# Altium PCB mini_backplane.PcbDoc (part 3 of 5)
Units mm, origin at the board's own origin, x right, y up, seen from the top; angles counter-clockwise.
Board outline 232.03 x 195 mm, 4 copper layers (Top Layer, GND, POWER, Bottom Layer); 241 components, 200 nets, 1637 pads, 676 vias.
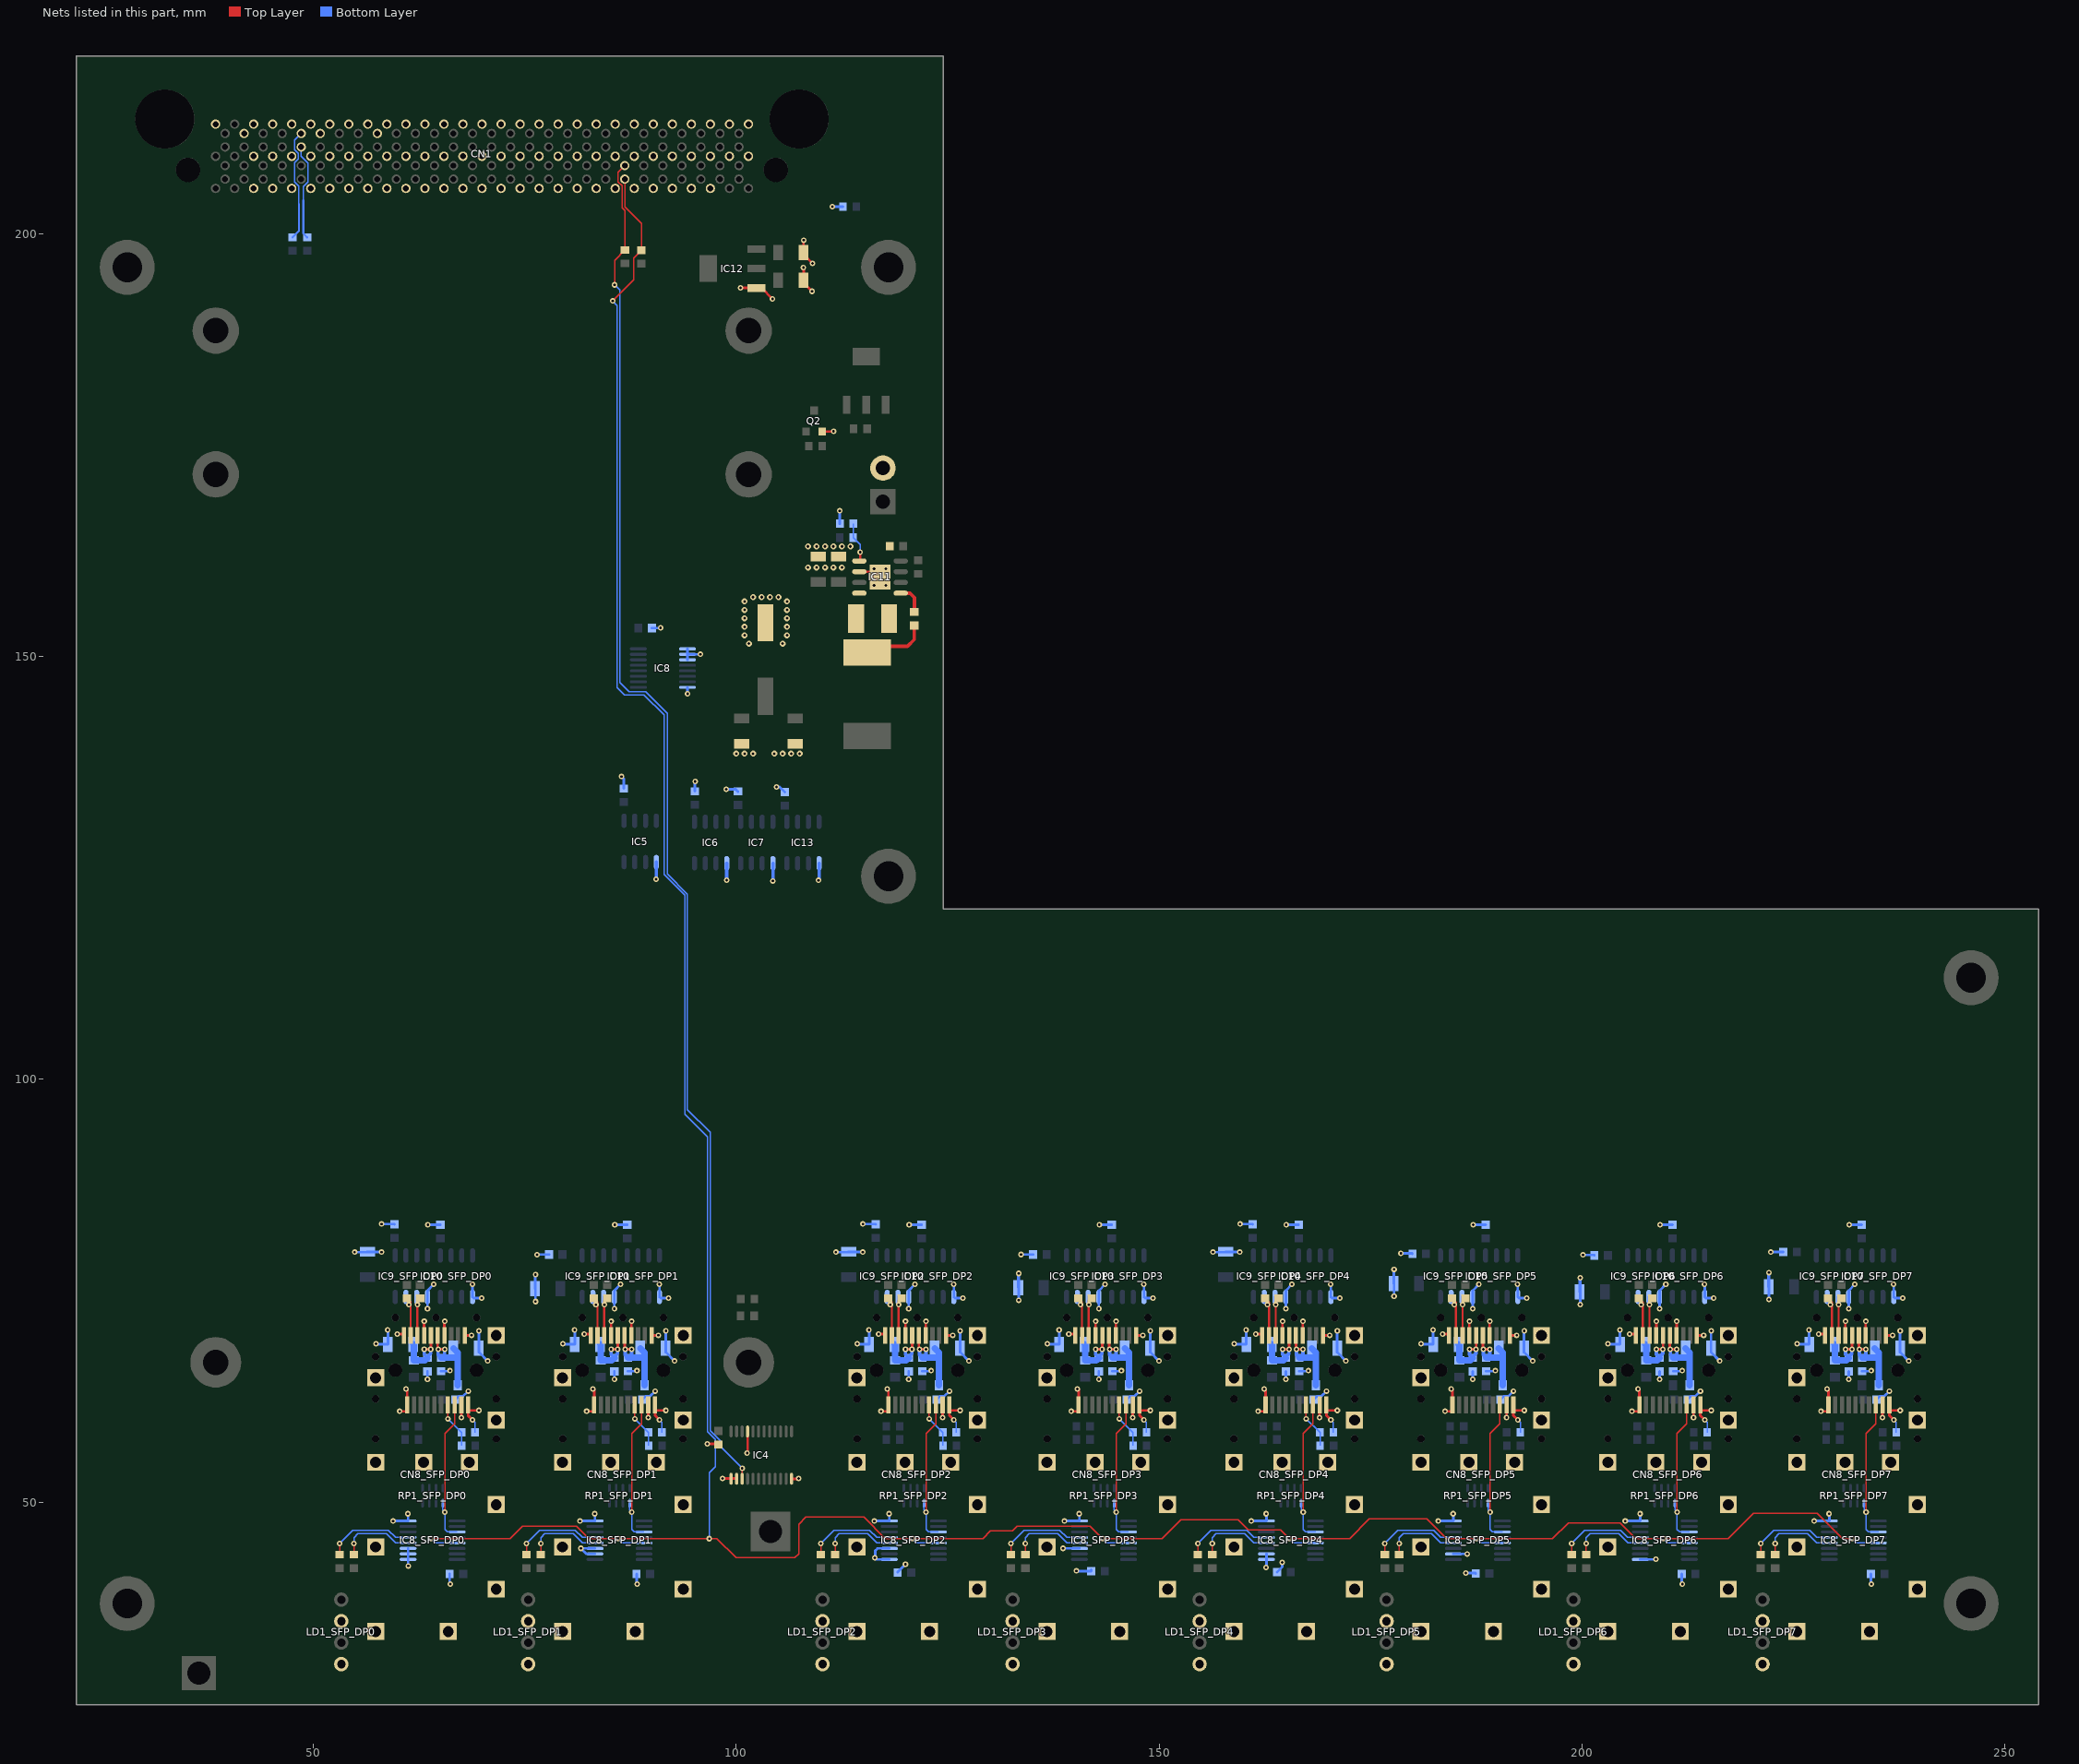
[diagram p5: the nets of this part, all layers, seen from the top]

## Via types
v1: diameter 0.66, hole 0.305, Top Layer to Bottom Layer, tented both sides, 576 vias
v2: diameter 0.711, hole 0.33, Top Layer to Bottom Layer, tented both sides, 97 vias
v3: diameter 0.66, hole 0.305, Top Layer to Bottom Layer, 3 vias

## Nets (pads, with @x,y where several pads share a name; then routed paths per layer and width w, separated by ;. In a path a pad name is that pad's centre, name@x,y a point inside that pad or via, vN(x,y) a via of type N, cw(c..) or ccw(c..) an arc to the next point about the centre after c; other vN are vias at no path point) (continued)
GND: C75.1 C76.1 C77.1 C78.1 C79_SFP_DP0.1 C79_SFP_DP1.1 C79_SFP_DP2.1 C79_SFP_DP3.1 C79_SFP_DP4.1 C79_SFP_DP5.1 C79_SFP_DP6.1 C79_SFP_DP7.1 C80_SFP_DP0.1 C80_SFP_DP1.1 C80_SFP_DP2.1 C80_SFP_DP3.1 C80_SFP_DP4.1 C80_SFP_DP5.1 C80_SFP_DP6.1 C80_SFP_DP7.1 C81_SFP_DP0.1 C81_SFP_DP1.1 C81_SFP_DP2.1 C81_SFP_DP3.1 C81_SFP_DP4.1 C81_SFP_DP5.1 C81_SFP_DP6.1 C81_SFP_DP7.1 C85.2 C86.1 C87.1 C88.1 C89.1 C90.1 C91.1 C92.1 C93.1 C117_SFP_DP0.2 C117_SFP_DP1.2 C117_SFP_DP2.2 C117_SFP_DP3.2 C117_SFP_DP4.2 C117_SFP_DP5.2 C117_SFP_DP6.2 C117_SFP_DP7.2 C118_SFP_DP0.2 C118_SFP_DP1.2 C118_SFP_DP2.2 C118_SFP_DP3.2 C118_SFP_DP4.2 C118_SFP_DP5.2 C118_SFP_DP6.2 C118_SFP_DP7.2 C120_SFP_DP0.1 C120_SFP_DP1.1 C120_SFP_DP2.1 C120_SFP_DP3.1 C120_SFP_DP4.1 C120_SFP_DP5.1 C120_SFP_DP6.1 C120_SFP_DP7.1 C121.1 C121_SFP_DP0.1 C121_SFP_DP1.1 C121_SFP_DP2.1 C121_SFP_DP3.1 C121_SFP_DP4.1 C121_SFP_DP5.1 C121_SFP_DP6.1 C121_SFP_DP7.1 C122_SFP_DP0.1 C122_SFP_DP1.1 C122_SFP_DP2.1 C122_SFP_DP3.1 C122_SFP_DP4.1 C122_SFP_DP5.1 C122_SFP_DP6.1 C122_SFP_DP7.1 C123_SFP_DP0.1 C123_SFP_DP1.1 C123_SFP_DP2.1 C123_SFP_DP3.1 C123_SFP_DP4.1 C123_SFP_DP5.1 C123_SFP_DP6.1 C123_SFP_DP7.1 CN1.1 CN1.5 CN1.7 CN1.10 CN1.13 CN1.16 CN1.17 CN1.19 CN1.22 CN1.25 CN1.26 CN1.28 CN1.31 CN1.34 CN1.37 CN1.40 CN1.43 CN1.46 CN1.49 CN1.52 CN1.55 CN1.58 CN1.61 CN1.64 CN1.67 CN1.70 CN1.73 CN1.76 CN1.79 CN1.82 CN1.85 CN1.86 CN1.89 CN1.92 CN1.92A CN1.95 CN1.95A CN1.98 CN1.98A CN1.101 CN1.101A CN1.104 CN1.104A CN1.107 CN1.107A CN1.110 CN1.110A CN1.113 CN1.113A CN1.116 CN1.116A CN1.119 CN1.119A CN1.122 CN1.122A CN1.125 CN1.125A CN1.128 CN1.128A CN1.131 CN1.131A CN1.134 CN1.134A CN1.137 CN1.137A CN1.140 CN1.140A CN1.143 CN1.143A CN1.146 CN1.146A CN1.149 CN1.149A CN1.152 CN1.152A CN1.155 CN1.155A CN1.158 CN1.158A CN1.161 CN1.161A CN1.164 CN1.164A CN2.2 CN8_SFP_DP0.1 CN8_SFP_DP0.9 CN8_SFP_DP0.10 CN8_SFP_DP0.11 CN8_SFP_DP0.14 CN8_SFP_DP0.17 CN8_SFP_DP0.20 CN8_SFP_DP0.21 CN8_SFP_DP0.22 CN8_SFP_DP0.23 CN8_SFP_DP0.24 CN8_SFP_DP0.25 CN8_SFP_DP0.26 CN8_SFP_DP0.27 CN8_SFP_DP0.28 CN8_SFP_DP0.29 CN8_SFP_DP0.30 CN8_SFP_DP0.31 CN8_SFP_DP1.1 CN8_SFP_DP1.9 CN8_SFP_DP1.10 CN8_SFP_DP1.11 CN8_SFP_DP1.14 CN8_SFP_DP1.17 CN8_SFP_DP1.20 CN8_SFP_DP1.21 CN8_SFP_DP1.22 CN8_SFP_DP1.23 CN8_SFP_DP1.24 CN8_SFP_DP1.25 CN8_SFP_DP1.26 CN8_SFP_DP1.27 CN8_SFP_DP1.28 CN8_SFP_DP1.29 CN8_SFP_DP1.30 CN8_SFP_DP1.31 CN8_SFP_DP2.1 CN8_SFP_DP2.9 CN8_SFP_DP2.10 CN8_SFP_DP2.11 CN8_SFP_DP2.14 CN8_SFP_DP2.17 CN8_SFP_DP2.20 CN8_SFP_DP2.21 CN8_SFP_DP2.22 CN8_SFP_DP2.23 CN8_SFP_DP2.24 CN8_SFP_DP2.25 CN8_SFP_DP2.26 CN8_SFP_DP2.27 CN8_SFP_DP2.28 CN8_SFP_DP2.29 CN8_SFP_DP2.30 CN8_SFP_DP2.31 CN8_SFP_DP3.1 CN8_SFP_DP3.9 CN8_SFP_DP3.10 CN8_SFP_DP3.11 CN8_SFP_DP3.14 CN8_SFP_DP3.17 CN8_SFP_DP3.20 CN8_SFP_DP3.21 CN8_SFP_DP3.22 CN8_SFP_DP3.23 CN8_SFP_DP3.24 CN8_SFP_DP3.25 CN8_SFP_DP3.26 CN8_SFP_DP3.27 CN8_SFP_DP3.28 CN8_SFP_DP3.29 CN8_SFP_DP3.30 CN8_SFP_DP3.31 CN8_SFP_DP4.1 CN8_SFP_DP4.9 CN8_SFP_DP4.10 CN8_SFP_DP4.11 CN8_SFP_DP4.14 CN8_SFP_DP4.17 CN8_SFP_DP4.20 CN8_SFP_DP4.21 CN8_SFP_DP4.22 CN8_SFP_DP4.23 CN8_SFP_DP4.24 CN8_SFP_DP4.25 CN8_SFP_DP4.26 CN8_SFP_DP4.27 CN8_SFP_DP4.28 CN8_SFP_DP4.29 CN8_SFP_DP4.30 CN8_SFP_DP4.31 CN8_SFP_DP5.1 CN8_SFP_DP5.9 CN8_SFP_DP5.10 CN8_SFP_DP5.11 CN8_SFP_DP5.14 CN8_SFP_DP5.17 CN8_SFP_DP5.20 CN8_SFP_DP5.21 CN8_SFP_DP5.22 CN8_SFP_DP5.23 CN8_SFP_DP5.24 CN8_SFP_DP5.25 CN8_SFP_DP5.26 CN8_SFP_DP5.27 CN8_SFP_DP5.28 CN8_SFP_DP5.29 CN8_SFP_DP5.30 CN8_SFP_DP5.31 CN8_SFP_DP6.1 CN8_SFP_DP6.9 CN8_SFP_DP6.10 CN8_SFP_DP6.11 CN8_SFP_DP6.14 CN8_SFP_DP6.17 CN8_SFP_DP6.20 CN8_SFP_DP6.21 CN8_SFP_DP6.22 CN8_SFP_DP6.23 CN8_SFP_DP6.24 CN8_SFP_DP6.25 CN8_SFP_DP6.26 CN8_SFP_DP6.27 CN8_SFP_DP6.28 CN8_SFP_DP6.29 CN8_SFP_DP6.30 CN8_SFP_DP6.31 CN8_SFP_DP7.1 CN8_SFP_DP7.9 CN8_SFP_DP7.10 CN8_SFP_DP7.11 CN8_SFP_DP7.14 CN8_SFP_DP7.17 CN8_SFP_DP7.20 CN8_SFP_DP7.21 CN8_SFP_DP7.22 CN8_SFP_DP7.23 CN8_SFP_DP7.24 CN8_SFP_DP7.25 CN8_SFP_DP7.26 CN8_SFP_DP7.27 CN8_SFP_DP7.28 CN8_SFP_DP7.29 CN8_SFP_DP7.30 CN8_SFP_DP7.31 D1.1 IC4.1 IC4.2 IC4.12 IC4.21 IC5.1 IC6.1 IC7.1 IC8.1 IC8.2 IC8.3 IC8.8 IC8_SFP_DP0.1 IC8_SFP_DP0.2 IC8_SFP_DP0.3 IC8_SFP_DP0.8 IC8_SFP_DP1.2 IC8_SFP_DP1.3 IC8_SFP_DP1.8 IC8_SFP_DP2.1 IC8_SFP_DP2.3 IC8_SFP_DP2.8 IC8_SFP_DP3.3 IC8_SFP_DP3.8 IC8_SFP_DP4.1 IC8_SFP_DP4.2 IC8_SFP_DP4.8 IC8_SFP_DP5.2 IC8_SFP_DP5.8 IC8_SFP_DP6.1 IC8_SFP_DP6.8 IC8_SFP_DP7.8 IC9_SFP_DP0.1 IC9_SFP_DP1.1 IC9_SFP_DP2.1 IC9_SFP_DP3.1 IC9_SFP_DP4.1 IC9_SFP_DP5.1 IC9_SFP_DP6.1 IC9_SFP_DP7.1 IC10_SFP_DP0.1 IC10_SFP_DP1.1 IC10_SFP_DP2.1 IC10_SFP_DP3.1 IC10_SFP_DP4.1 IC10_SFP_DP5.1 IC10_SFP_DP6.1 IC10_SFP_DP7.1 IC11.6 IC11.PAD IC12.1 IC13.1 LD1_SFP_DP0.1 LD1_SFP_DP0.3 LD1_SFP_DP1.1 LD1_SFP_DP1.3 LD1_SFP_DP2.1 LD1_SFP_DP2.3 LD1_SFP_DP3.1 LD1_SFP_DP3.3 LD1_SFP_DP4.1 LD1_SFP_DP4.3 LD1_SFP_DP5.1 LD1_SFP_DP5.3 LD1_SFP_DP6.1 LD1_SFP_DP6.3 LD1_SFP_DP7.1 LD1_SFP_DP7.3 Q2.2 R12.2 R70_SFP_DP0.1 R70_SFP_DP1.1 R70_SFP_DP2.1 R70_SFP_DP3.1 R70_SFP_DP4.1 R70_SFP_DP5.1 R70_SFP_DP6.1 R70_SFP_DP7.1 R77.1 | length 416.9
  Top Layer w0.305: v1(59.944,69.85) 60.552,69.85 CN8_SFP_DP0.20@60.709,69.694 ; v1(60.223,60.731) 61.036,60.731 61.109,60.804 CN8_SFP_DP0.1@61.109,61.494 61.109,63.351 61.087,63.373 v1(60.96,63.373) ; CN8_SFP_DP0.17@63.109,69.694 63.109,71.364 v1(63.119,71.374) ; CN8_SFP_DP0.14@65.509,69.694 65.509,71.351 v1(65.532,71.374) ; v1(67.509,59.999) CN8_SFP_DP0.9@67.509,61.494 ; CN8_SFP_DP0.11@67.909,69.694 68.678,69.694 v1(68.707,69.723) ; v1(68.834,59.715) 68.309,60.241 CN8_SFP_DP0.10@68.309,61.494 68.309,60.833 v1(69.596,60.833) ; v1(82.042,69.85) 82.65,69.85 CN8_SFP_DP1.20@82.807,69.694 ; v1(82.321,60.731) 83.134,60.731 83.207,60.804 CN8_SFP_DP1.1@83.207,61.494 83.207,63.351 83.185,63.373 v1(83.058,63.373) ; CN8_SFP_DP1.17@85.207,69.694 85.207,71.364 v1(85.217,71.374) ; CN8_SFP_DP1.14@87.607,69.694 87.607,71.351 v1(87.63,71.374) ; v1(89.607,59.999) CN8_SFP_DP1.9@89.607,61.494 ; CN8_SFP_DP1.11@90.007,69.694 90.776,69.694 v1(90.805,69.723) ; v1(90.932,59.715) 90.407,60.241 CN8_SFP_DP1.10@90.407,61.494 90.407,60.833 v1(91.694,60.833) ; v1(96.596,56.871) 97.828,56.871 C75.1@97.892,56.807 ; v1(98.4,52.781) 100.015,52.781 IC4.2@100.047,52.75 ; v1(100.508,193.573) 100.522,193.559 IC12.1@102.393,193.559 103.011,193.559 v1(104.292,192.278) ; v1(101.295,55.804) 101.347,55.855 IC4.21@101.347,58.35 101.347,57.125 ; IC4.12@106.547,52.75 107.36,52.75 v1(107.391,52.781) ; v1(107.95,195.961) 107.977,195.934 C89.1@107.977,194.462 107.977,194.156 v1(108.966,193.167) ; v1(107.975,199.212) 107.951,199.188 C86.1@107.951,197.764 107.951,197.534 v1(109.017,196.469) ; Q2.2@110.17,176.575 111.475,176.575 v1(111.506,176.606) ; IC11.6@114.554,160.01 116.369,160.01 IC11.PAD@117.004,159.375 ; v1(116.84,69.85) 117.448,69.85 CN8_SFP_DP2.20@117.605,69.694 ; v1(117.119,60.731) 117.932,60.731 118.005,60.804 CN8_SFP_DP2.1@118.005,61.494 118.005,63.351 117.983,63.373 v1(117.856,63.373) ; CN8_SFP_DP2.17@120.005,69.694 120.005,71.364 v1(120.015,71.374) ; CN8_SFP_DP2.14@122.405,69.694 122.405,71.351 v1(122.428,71.374) ; v1(124.405,59.999) CN8_SFP_DP2.9@124.405,61.494 ; CN8_SFP_DP2.11@124.805,69.694 125.574,69.694 v1(125.603,69.723) ; v1(125.73,59.715) 125.205,60.241 CN8_SFP_DP2.10@125.205,61.494 125.205,60.833 v1(126.492,60.833) ; v1(139.319,69.85) 139.927,69.85 CN8_SFP_DP3.20@140.084,69.694 ; v1(139.598,60.731) 140.411,60.731 140.484,60.804 CN8_SFP_DP3.1@140.484,61.494 140.484,63.351 140.462,63.373 v1(140.335,63.373) ; CN8_SFP_DP3.17@142.484,69.694 142.484,71.364 v1(142.494,71.374) ; CN8_SFP_DP3.14@144.884,69.694 144.884,71.351 v1(144.907,71.374) ; v1(146.884,59.999) CN8_SFP_DP3.9@146.884,61.494 ; CN8_SFP_DP3.11@147.284,69.694 148.053,69.694 v1(148.082,69.723) ; v1(148.209,59.715) 147.684,60.241 CN8_SFP_DP3.10@147.684,61.494 147.684,60.833 v1(148.971,60.833) ; v1(161.417,69.85) 162.025,69.85 CN8_SFP_DP4.20@162.182,69.694 ; v1(161.696,60.731) 162.509,60.731 162.582,60.804 CN8_SFP_DP4.1@162.582,61.494 162.582,63.351 162.56,63.373 v1(162.433,63.373) ; CN8_SFP_DP4.17@164.582,69.694 164.582,71.364 v1(164.592,71.374) ; CN8_SFP_DP4.14@166.982,69.694 166.982,71.351 v1(167.005,71.374) ; v1(168.982,59.999) CN8_SFP_DP4.9@168.982,61.494 ; CN8_SFP_DP4.11@169.382,69.694 170.151,69.694 v1(170.18,69.723) ; v1(170.307,59.715) 169.782,60.241 CN8_SFP_DP4.10@169.782,61.494 169.782,60.833 v1(171.069,60.833) ; v1(183.515,69.85) 184.123,69.85 CN8_SFP_DP5.20@184.28,69.694 ; v1(183.794,60.731) 184.607,60.731 184.68,60.804 CN8_SFP_DP5.1@184.68,61.494 184.68,63.351 184.658,63.373 v1(184.531,63.373) ; CN8_SFP_DP5.17@186.68,69.694 186.68,71.364 v1(186.69,71.374) ; CN8_SFP_DP5.14@189.08,69.694 189.08,71.351 v1(189.103,71.374) ; v1(191.08,59.999) CN8_SFP_DP5.9@191.08,61.494 ; CN8_SFP_DP5.11@191.48,69.694 192.249,69.694 v1(192.278,69.723) ; v1(192.405,59.715) 191.88,60.241 CN8_SFP_DP5.10@191.88,61.494 191.88,60.833 v1(193.167,60.833) ; v1(205.613,69.85) 206.221,69.85 CN8_SFP_DP6.20@206.378,69.694 ; v1(205.892,60.731) 206.705,60.731 206.778,60.804 CN8_SFP_DP6.1@206.778,61.494 206.778,63.351 206.756,63.373 v1(206.629,63.373) ; CN8_SFP_DP6.17@208.778,69.694 208.778,71.364 v1(208.788,71.374) ; CN8_SFP_DP6.14@211.178,69.694 211.178,71.351 v1(211.201,71.374) ; v1(213.178,59.999) CN8_SFP_DP6.9@213.178,61.494 ; CN8_SFP_DP6.11@213.578,69.694 214.347,69.694 v1(214.376,69.723) ; v1(214.503,59.715) 213.978,60.241 CN8_SFP_DP6.10@213.978,61.494 213.978,60.833 v1(215.265,60.833) ; v1(227.965,69.85) 228.573,69.85 CN8_SFP_DP7.20@228.73,69.694 ; v1(228.244,60.731) 229.057,60.731 229.13,60.804 CN8_SFP_DP7.1@229.13,61.494 229.13,63.351 229.108,63.373 v1(228.981,63.373) ; CN8_SFP_DP7.17@231.13,69.694 231.13,71.364 v1(231.14,71.374) ; CN8_SFP_DP7.14@233.53,69.694 233.53,71.351 v1(233.553,71.374) ; v1(235.53,59.999) CN8_SFP_DP7.9@235.53,61.494 ; CN8_SFP_DP7.11@235.93,69.694 236.699,69.694 v1(236.728,69.723) ; v1(236.855,59.715) 236.33,60.241 CN8_SFP_DP7.10@236.33,61.494 236.33,60.833 v1(237.617,60.833)
  Bottom Layer w0.152: v1(68.834,59.715) 69.126,59.423 R70_SFP_DP0.1@69.126,58.242 ; v1(90.932,59.715) 91.224,59.423 R70_SFP_DP1.1@91.224,58.242 ; v1(125.73,59.715) 126.022,59.423 R70_SFP_DP2.1@126.022,58.242 ; v1(148.209,59.715) 148.501,59.423 R70_SFP_DP3.1@148.501,58.242 ; v1(170.307,59.715) 170.599,59.423 R70_SFP_DP4.1@170.599,58.242 ; v1(192.405,59.715) 192.697,59.423 R70_SFP_DP5.1@192.697,58.242 ; v1(214.503,59.715) 214.795,59.423 R70_SFP_DP6.1@214.795,58.242 ; v1(236.855,59.715) 237.147,59.423 R70_SFP_DP7.1@237.147,58.242
  Bottom Layer w0.305: v1(54.889,79.553) v1(58.064,79.553) 58.012,79.605 C122_SFP_DP0.1@56.388,79.605 ; v1(57.404,68.707) 57.455,68.656 C120_SFP_DP0.1@58.825,68.656 58.825,70.334 v1(58.801,70.358) ; v1(58.09,82.88) 59.55,82.88 C80_SFP_DP0.1@59.588,82.842 ; v1(59.436,47.752) 59.45,47.766 IC8_SFP_DP0.8@61.21,47.766 61.21,48.595 v1(61.189,48.616) ; IC8_SFP_DP0.3@61.21,44.516 61.21,42.473 v3(61.239,42.443) ; v1(63.5,64.516) C79_SFP_DP0.1@63.5,65.443 ; v1(63.5,72.873) IC9_SFP_DP0.1@63.5,74.258 63.5,75.006 v1(64.237,75.743) ; v1(63.551,82.779) 63.563,82.791 C81_SFP_DP0.1@65.024,82.791 ; C118_SFP_DP0.2@65.1,65.469 66.104,65.469 v1(66.167,65.532) ; C121_SFP_DP0.1@66.129,41.504 66.129,40.373 v1(66.192,40.31) ; C123_SFP_DP0.1@66.789,62.103 67.17,62.484 67.691,62.484 v1(68.326,63.119) ; v1(68.809,75.743) 68.834,75.717 IC10_SFP_DP0.1@68.834,74.258 68.975,74.117 v1(69.901,74.117) ; v1(69.596,70.231) 69.469,70.231 69.572,70.128 C117_SFP_DP0.2@69.572,68.174 69.572,67.715 v1(70.612,66.675) ; C122_SFP_DP1.1@76.224,75.209 76.224,76.834 v1(76.276,76.886) v1(76.276,73.711) ; v1(76.454,79.248) 76.479,79.273 C80_SFP_DP1.1@77.864,79.273 ; v1(79.502,68.707) 79.553,68.656 C120_SFP_DP1.1@80.923,68.656 80.923,70.334 v1(80.899,70.358) ; v1(81.534,47.752) 81.548,47.766 IC8_SFP_DP1.8@83.308,47.766 83.308,48.595 v1(83.287,48.616) ; v3(81.636,44.526) v3@81.645,44.516 ; IC8_SFP_DP1.2@83.308,43.866 82.295,43.866 v3@81.645,44.516 ; IC8_SFP_DP1.3@83.308,44.516 v3@81.645,44.516 ; v1(85.598,64.516) C79_SFP_DP1.1@85.598,65.443 ; v1(85.598,72.873) IC9_SFP_DP1.1@85.598,74.258 85.598,75.006 v1(86.335,75.743) ; v1(85.649,82.779) 85.661,82.791 C81_SFP_DP1.1@87.122,82.791 ; v1(86.436,135.788) 86.716,135.509 C77.1@86.716,134.379 ; C118_SFP_DP1.2@87.198,65.469 88.202,65.469 v1(88.265,65.532) ; C121_SFP_DP1.1@88.227,41.504 88.227,40.373 v1(88.29,40.31) ; C123_SFP_DP1.1@88.887,62.103 89.268,62.484 89.789,62.484 v1(90.424,63.119) ; C121.1@90.03,153.34 91.034,153.34 v1(91.059,153.365) ; v1(90.907,75.743) 90.932,75.717 IC10_SFP_DP1.1@90.932,74.258 91.073,74.117 v1(91.999,74.117) ; v1(91.694,70.231) 91.567,70.231 91.67,70.128 C117_SFP_DP1.2@91.67,68.174 91.67,67.715 v1(92.71,66.675) ; IC8.8@94.238,146.34 94.238,145.588 v1(94.259,145.567) ; IC8.3@94.238,149.59 IC8.2@94.238,150.24 ; IC8.1@94.238,150.89 IC8.2@94.238,150.24 ; C90.1@95.123,134.048 95.123,135.179 v1(95.148,135.204) ; v1(95.758,150.241) IC8.2@94.238,150.24 ; v1(98.806,134.29) 99.936,134.29 C76.1@100.203,134.023 ; v1(104.775,134.569) 105.118,134.569 C78.1@105.74,133.947 ; v1(111.354,203.175) R12.2@112.611,203.175 ; v1(111.785,79.553) v1(114.96,79.553) 114.908,79.605 C122_SFP_DP2.1@113.284,79.605 ; v1(112.243,167.208) 112.255,167.195 C91.1@112.255,165.684 ; v1(114.3,68.707) 114.351,68.656 C120_SFP_DP2.1@115.721,68.656 115.721,70.334 v1(115.697,70.358) ; v1(114.986,82.88) 116.446,82.88 C80_SFP_DP2.1@116.484,82.842 ; v1(116.332,47.752) 116.346,47.766 IC8_SFP_DP2.8@118.106,47.766 118.106,48.595 v1(118.085,48.616) ; IC8_SFP_DP2.1@118.106,43.216 116.575,43.216 v1(116.383,43.409) 116.434,43.459 116.434,44.247 116.703,44.516 IC8_SFP_DP2.3@118.106,44.516 ; C121_SFP_DP2.1@119.088,41.72 v1(120.015,42.647) ; v1(120.396,64.516) C79_SFP_DP2.1@120.396,65.443 ; v1(120.396,72.873) IC9_SFP_DP2.1@120.396,74.258 120.396,75.006 v1(121.133,75.743) ; v1(120.447,82.779) 120.459,82.791 C81_SFP_DP2.1@121.92,82.791 ; C118_SFP_DP2.2@121.996,65.469 123,65.469 v1(123.063,65.532) ; C123_SFP_DP2.1@123.685,62.103 124.066,62.484 124.587,62.484 v1(125.222,63.119) ; v1(125.705,75.743) 125.73,75.717 IC10_SFP_DP2.1@125.73,74.258 125.871,74.117 v1(126.797,74.117) ; v1(126.492,70.231) 126.365,70.231 126.468,70.128 C117_SFP_DP2.2@126.468,68.174 126.468,67.715 v1(127.508,66.675) ; C122_SFP_DP3.1@133.349,75.362 133.349,76.986 v1(133.401,77.038) v1(133.401,73.863) ; v1(133.68,79.273) C80_SFP_DP3.1@135.09,79.273 ; v1(136.779,68.707) 136.83,68.656 C120_SFP_DP3.1@138.2,68.656 138.2,70.334 v1(138.176,70.358) ; v1(138.633,44.526) 140.575,44.526 IC8_SFP_DP3.3@140.585,44.516 ; v1(138.811,47.752) 138.825,47.766 IC8_SFP_DP3.8@140.585,47.766 140.585,48.595 v1(140.564,48.616) ; v1(140.208,41.859) 140.233,41.834 C121_SFP_DP3.1@141.973,41.834 C121_SFP_DP3.1@141.973,41.999 ; v1(142.875,64.516) C79_SFP_DP3.1@142.875,65.443 ; v1(142.875,72.873) IC9_SFP_DP3.1@142.875,74.258 142.875,75.006 v1(143.612,75.743) ; v1(142.926,82.779) 142.938,82.791 C81_SFP_DP3.1@144.399,82.791 ; C118_SFP_DP3.2@144.475,65.469 145.479,65.469 v1(145.542,65.532) ; C123_SFP_DP3.1@146.164,62.103 146.545,62.484 147.066,62.484 v1(147.701,63.119) ; v1(148.184,75.743) 148.209,75.717 IC10_SFP_DP3.1@148.209,74.258 148.35,74.117 v1(149.276,74.117) ; v1(148.971,70.231) 148.844,70.231 148.947,70.128 C117_SFP_DP3.2@148.947,68.174 148.947,67.715 v1(149.987,66.675) ; v1(156.362,79.553) v1(159.537,79.553) 159.485,79.605 C122_SFP_DP4.1@157.861,79.605 ; v1(158.877,68.707) 158.928,68.656 C120_SFP_DP4.1@160.298,68.656 160.298,70.334 v1(160.274,70.358) ; v1(159.563,82.88) 161.023,82.88 C80_SFP_DP4.1@161.061,82.842 ; v1(160.909,47.752) 160.923,47.766 IC8_SFP_DP4.8@162.683,47.766 162.683,48.595 v1(162.662,48.616) ; v1(162.636,42.266) 162.683,42.312 IC8_SFP_DP4.1@162.683,43.216 IC8_SFP_DP4.2@162.683,43.866 ; C121_SFP_DP4.1@163.944,41.732 164.541,42.329 v1(164.541,42.85) ; v1(164.973,64.516) C79_SFP_DP4.1@164.973,65.443 ; v1(164.973,72.873) IC9_SFP_DP4.1@164.973,74.258 164.973,75.006 v1(165.71,75.743) ; v1(165.024,82.779) 165.036,82.791 C81_SFP_DP4.1@166.497,82.791 ; C118_SFP_DP4.2@166.573,65.469 167.577,65.469 v1(167.64,65.532) ; C123_SFP_DP4.1@168.262,62.103 168.643,62.484 169.164,62.484 v1(169.799,63.119) ; v1(170.282,75.743) 170.307,75.717 IC10_SFP_DP4.1@170.307,74.258 170.448,74.117 v1(171.374,74.117) ; v1(171.069,70.231) 170.942,70.231 171.045,70.128 C117_SFP_DP4.2@171.045,68.174 171.045,67.715 v1(172.085,66.675) ; C122_SFP_DP5.1@177.722,75.844 177.722,77.469 v1(177.775,77.521) v1(177.775,74.346) ; v1(178.587,79.4) 179.896,79.4 C80_SFP_DP5.1@179.946,79.35 ; v1(180.975,68.707) 181.026,68.656 C120_SFP_DP5.1@182.396,68.656 182.396,70.334 v1(182.372,70.358) ; v1(183.007,47.752) 183.021,47.766 IC8_SFP_DP5.8@184.781,47.766 184.781,48.595 v1(184.76,48.616) ; IC8_SFP_DP5.2@184.781,43.866 v1(186.436,43.866) ; v1(186.258,41.605) 187.389,41.605 C121_SFP_DP5.1@187.439,41.554 ; v1(187.071,64.516) C79_SFP_DP5.1@187.071,65.443 ; v1(187.071,72.873) IC9_SFP_DP5.1@187.071,74.258 187.071,75.006 v1(187.808,75.743) ; v1(187.122,82.779) 187.134,82.791 C81_SFP_DP5.1@188.595,82.791 ; C118_SFP_DP5.2@188.671,65.469 189.675,65.469 v1(189.738,65.532) ; C123_SFP_DP5.1@190.36,62.103 190.741,62.484 191.262,62.484 v1(191.897,63.119) ; v1(192.38,75.743) 192.405,75.717 IC10_SFP_DP5.1@192.405,74.258 192.546,74.117 v1(193.472,74.117) ; v1(193.167,70.231) 193.04,70.231 193.143,70.128 C117_SFP_DP5.2@193.143,68.174 193.143,67.715 v1(194.183,66.675) ; C122_SFP_DP6.1@199.719,74.854 199.719,76.478 v1(199.771,76.53) v1(199.771,73.355) ; v1(200.101,79.223) 201.409,79.223 C80_SFP_DP6.1@201.46,79.172 ; v1(203.073,68.707) 203.124,68.656 C120_SFP_DP6.1@204.494,68.656 204.494,70.334 v1(204.47,70.358) ; v1(205.105,47.752) 205.119,47.766 IC8_SFP_DP6.8@206.879,47.766 206.879,48.595 v1(206.858,48.616) ; IC8_SFP_DP6.1@206.879,43.216 208.723,43.216 v1(208.737,43.231) ; v1(209.169,64.516) C79_SFP_DP6.1@209.169,65.443 ; v1(209.169,72.873) IC9_SFP_DP6.1@209.169,74.258 209.169,75.006 v1(209.906,75.743) ; v1(209.22,82.779) 209.232,82.791 C81_SFP_DP6.1@210.693,82.791 ; C118_SFP_DP6.2@210.769,65.469 211.773,65.469 v1(211.836,65.532) ; C121_SFP_DP6.1@211.798,41.504 211.798,40.373 v1(211.861,40.31) ; C123_SFP_DP6.1@212.458,62.103 212.839,62.484 213.36,62.484 v1(213.995,63.119) ; v1(214.478,75.743) 214.503,75.717 IC10_SFP_DP6.1@214.503,74.258 214.644,74.117 v1(215.57,74.117) ; v1(215.265,70.231) 215.138,70.231 215.241,70.128 C117_SFP_DP6.2@215.241,68.174 215.241,67.715 v1(216.281,66.675) ; C122_SFP_DP7.1@222.045,75.463 222.045,77.088 v1(222.098,77.14) v1(222.098,73.965) ; v1(222.301,79.553) 222.326,79.578 C80_SFP_DP7.1@223.787,79.578 ; v1(225.425,68.707) 225.476,68.656 C120_SFP_DP7.1@226.846,68.656 226.846,70.334 v1(226.822,70.358) ; v1(227.457,47.752) 227.471,47.766 IC8_SFP_DP7.8@229.231,47.766 229.231,48.595 v1(229.21,48.616) ; v1(231.521,64.516) C79_SFP_DP7.1@231.521,65.443 ; v1(231.521,72.873) IC9_SFP_DP7.1@231.521,74.258 231.521,75.006 v1(232.258,75.743) ; v1(231.572,82.779) 231.584,82.791 C81_SFP_DP7.1@233.045,82.791 ; C118_SFP_DP7.2@233.121,65.469 234.125,65.469 v1(234.188,65.532) ; C121_SFP_DP7.1@234.15,41.504 234.15,40.373 v1(234.213,40.31) ; C123_SFP_DP7.1@234.81,62.103 235.191,62.484 235.712,62.484 v1(236.347,63.119) ; v1(236.83,75.743) 236.855,75.717 IC10_SFP_DP7.1@236.855,74.258 236.996,74.117 v1(237.922,74.117) ; v1(237.617,70.231) 237.49,70.231 237.593,70.128 C117_SFP_DP7.2@237.593,68.174 237.593,67.715 v1(238.633,66.675)
  Bottom Layer w0.406: v1(90.526,123.647) 90.551,123.673 IC5.1@90.551,125.668 ; v1(98.882,123.546) IC6.1@98.882,125.541 ; v1(104.343,123.444) IC7.1@104.343,125.541 ; v1(109.728,123.52) 109.804,123.596 IC13.1@109.804,125.541
  other v2: 100,138.5 101,138.5 102,138.5 104.5,138.5 105.5,138.5 106.5,138.5 107.5,138.5 101.5,151.5 105.5,151.5 101,152.5 106,152.5 101,153.5 106,153.5 101,154.5 106,154.5 101,155.5 106,155.5 101,156.5 106,156.5 102,157 103,157 104,157 105,157 116.304,158.375 117.704,158.375 116.304,160.375 117.704,160.375 108.5,160.5 109.5,160.5 110.5,160.5 111.5,160.5 112.5,160.5 108.5,163 109.5,163 110.5,163 111.5,163 112.5,163 113.5,163
I2C_IRQ: CN1.105 IC8_SFP_DP0.13 IC8_SFP_DP1.13 IC8_SFP_DP2.13 IC8_SFP_DP3.13 IC8_SFP_DP4.13 IC8_SFP_DP5.13 IC8_SFP_DP6.13 IC8_SFP_DP7.13 R1.1 | length 380.9
  Top Layer w0.152: v1(63.932,45.669) 73.279,45.669 74.752,47.142 81.128,47.142 82.601,45.669 v1(86.03,45.669) v1(96.825,45.669) 97.714,45.669 99.974,43.409 106.934,43.409 107.417,43.891 107.417,47.371 108.255,48.209 115.085,48.209 117.625,45.669 v1(120.828,45.669) 129.159,45.669 130.073,46.584 132.664,46.584 133.223,47.142 141.834,47.142 v1(143.307,45.669) 150.343,45.669 152.603,47.93 159.334,47.93 160.553,46.711 164.363,46.711 v1(165.405,45.669) 172.517,45.669 174.854,48.006 181.661,48.006 183.998,45.669 v1(187.503,45.669) 196.494,45.669 198.374,47.549 204.518,47.549 206.372,45.695 209.575,45.695 v1(209.601,45.669) 217.246,45.669 220.269,48.692 227.787,48.692 230.81,45.669 v1(231.953,45.669) ; v1(85.395,192.024) 87.884,194.513 87.884,197.117 R1.1@88.798,198.031 88.798,201.193 88.417,201.574 ; CN1.105@86.827,206.434 86.827,203.165 88.417,201.574 ; 88.468,201.524 88.417,201.574
  Bottom Layer w0.152: v1(63.932,45.669) 64.435,45.166 IC8_SFP_DP0.13@67.01,45.166 ; v1(85.395,192.024) 85.928,191.491 85.928,190.602 ; 85.928,191.059 85.928,190.602 ; v1(86.03,45.669) 86.533,45.166 IC8_SFP_DP1.13@89.108,45.166 ; v1(96.825,45.669) 96.825,53.467 97.561,54.204 97.561,57.379 96.622,58.319 96.622,93.167 93.934,95.855 93.934,121.763 91.465,124.231 91.465,143.078 89.103,145.44 86.792,145.44 85.928,146.304 85.928,190.602 ; v1(120.828,45.669) 121.331,45.166 IC8_SFP_DP2.13@123.906,45.166 ; v1(143.307,45.669) 143.81,45.166 IC8_SFP_DP3.13@146.385,45.166 ; v1(165.405,45.669) 165.908,45.166 IC8_SFP_DP4.13@168.483,45.166 ; v1(187.503,45.669) 188.006,45.166 IC8_SFP_DP5.13@190.581,45.166 ; v1(209.601,45.669) 210.104,45.166 IC8_SFP_DP6.13@212.679,45.166 ; v1(231.953,45.669) 232.456,45.166 IC8_SFP_DP7.13@235.031,45.166
I2C_NRST: CN1.106 IC4.3 R2.1 | length 164.2
  Top Layer w0.152: v1(85.623,193.929) 85.623,196.837 R2.1@86.843,198.056 86.843,202.718 86.522,203.039 86.522,205.637 86.048,206.111 86.048,207.255 CN1.106@86.827,208.034 ; IC4.3@100.697,52.75 100.697,53.986 v1(100.711,54)
  Bottom Layer w0.152: v1(85.623,193.929) 86.233,193.319 86.233,190.551 ; 86.233,190.932 86.233,190.551 ; v1(100.711,54) 98.196,56.515 98.196,57.175 96.926,58.445 96.926,93.701 94.239,96.388 94.239,121.89 91.872,124.257 91.872,143.231 89.281,145.821 87.325,145.821 86.233,146.914 86.233,190.551
LED_LINK_SFP_DP0: IC8_SFP_DP0.4 R9_SFP_DP0.1 | length 9.1
  Top Layer w0.152: R9_SFP_DP0.1@54.813,43.777 v1(54.813,45.11)
  Bottom Layer w0.152: v1(54.813,45.11) 54.813,45.796 55.27,46.253 58.649,46.253 59.741,45.161 61.204,45.161 IC8_SFP_DP0.4@61.21,45.166
LED_LINK_SFP_DP1: IC8_SFP_DP1.4 R9_SFP_DP1.1 | length 9.1
  Top Layer w0.152: R9_SFP_DP1.1@76.911,43.777 v1(76.911,45.11)
  Bottom Layer w0.152: v1(76.911,45.11) 76.911,45.796 77.368,46.253 80.747,46.253 81.839,45.161 83.302,45.161 IC8_SFP_DP1.4@83.308,45.166
LED_LINK_SFP_DP2: IC8_SFP_DP2.4 R9_SFP_DP2.1 | length 9.1
  Top Layer w0.152: R9_SFP_DP2.1@111.709,43.777 v1(111.709,45.11)
  Bottom Layer w0.152: v1(111.709,45.11) 111.709,45.796 112.166,46.253 115.545,46.253 116.637,45.161 118.1,45.161 IC8_SFP_DP2.4@118.106,45.166
LED_LINK_SFP_DP3: IC8_SFP_DP3.4 R9_SFP_DP3.1 | length 9.1
  Top Layer w0.152: R9_SFP_DP3.1@134.188,43.777 v1(134.188,45.11)
  Bottom Layer w0.152: v1(134.188,45.11) 134.188,45.796 134.645,46.253 138.024,46.253 139.116,45.161 140.579,45.161 IC8_SFP_DP3.4@140.585,45.166
LED_LINK_SFP_DP4: IC8_SFP_DP4.4 R9_SFP_DP4.1 | length 9.1
  Top Layer w0.152: R9_SFP_DP4.1@156.286,43.777 v1(156.286,45.11)
  Bottom Layer w0.152: v1(156.286,45.11) 156.286,45.796 156.743,46.253 160.122,46.253 161.214,45.161 162.677,45.161 IC8_SFP_DP4.4@162.683,45.166
LED_LINK_SFP_DP5: IC8_SFP_DP5.4 R9_SFP_DP5.1 | length 9.1
  Top Layer w0.152: R9_SFP_DP5.1@178.384,43.777 v1(178.384,45.11)
  Bottom Layer w0.152: v1(178.384,45.11) 178.384,45.796 178.841,46.253 182.22,46.253 183.312,45.161 184.775,45.161 IC8_SFP_DP5.4@184.781,45.166
LED_LINK_SFP_DP6: IC8_SFP_DP6.4 R9_SFP_DP6.1 | length 9.1
  Top Layer w0.152: R9_SFP_DP6.1@200.482,43.777 v1(200.482,45.11)
  Bottom Layer w0.152: v1(200.482,45.11) 200.482,45.796 200.939,46.253 204.318,46.253 205.41,45.161 206.873,45.161 IC8_SFP_DP6.4@206.879,45.166
LED_LINK_SFP_DP7: IC8_SFP_DP7.4 R9_SFP_DP7.1 | length 9.1
  Top Layer w0.152: R9_SFP_DP7.1@222.834,43.777 v1(222.834,45.11)
  Bottom Layer w0.152: v1(222.834,45.11) 222.834,45.796 223.291,46.253 226.67,46.253 227.762,45.161 229.225,45.161 IC8_SFP_DP7.4@229.231,45.166
LED_STAT_SFP_DP0: IC8_SFP_DP0.5 R10_SFP_DP0.1 | length 10.4
  Top Layer w0.152: R10_SFP_DP0.1@53.111,43.777 v1(53.111,45.11)
  Bottom Layer w0.152: v1(53.111,45.11) 54.661,46.66 58.877,46.66 59.715,45.822 61.204,45.822 IC8_SFP_DP0.5@61.21,45.816
LED_STAT_SFP_DP1: IC8_SFP_DP1.5 R10_SFP_DP1.1 | length 10.4
  Top Layer w0.152: R10_SFP_DP1.1@75.209,43.777 v1(75.209,45.11)
  Bottom Layer w0.152: v1(75.209,45.11) 76.759,46.66 80.975,46.66 81.813,45.822 83.302,45.822 IC8_SFP_DP1.5@83.308,45.816
LED_STAT_SFP_DP2: IC8_SFP_DP2.5 R10_SFP_DP2.1 | length 10.4
  Top Layer w0.152: R10_SFP_DP2.1@110.007,43.777 v1(110.007,45.11)
  Bottom Layer w0.152: v1(110.007,45.11) 111.557,46.66 115.773,46.66 116.611,45.822 118.1,45.822 IC8_SFP_DP2.5@118.106,45.816
LED_STAT_SFP_DP3: IC8_SFP_DP3.5 R10_SFP_DP3.1 | length 10.4
  Top Layer w0.152: R10_SFP_DP3.1@132.486,43.777 v1(132.486,45.11)
  Bottom Layer w0.152: v1(132.486,45.11) 134.036,46.66 138.252,46.66 139.09,45.822 140.579,45.822 IC8_SFP_DP3.5@140.585,45.816
LED_STAT_SFP_DP4: IC8_SFP_DP4.5 R10_SFP_DP4.1 | length 10.4
  Top Layer w0.152: R10_SFP_DP4.1@154.584,43.777 v1(154.584,45.11)
  Bottom Layer w0.152: v1(154.584,45.11) 156.134,46.66 160.35,46.66 161.188,45.822 162.677,45.822 IC8_SFP_DP4.5@162.683,45.816
LED_STAT_SFP_DP5: IC8_SFP_DP5.5 R10_SFP_DP5.1 | length 10.4
  Top Layer w0.152: R10_SFP_DP5.1@176.682,43.777 v1(176.682,45.11)
  Bottom Layer w0.152: v1(176.682,45.11) 178.232,46.66 182.448,46.66 183.286,45.822 184.775,45.822 IC8_SFP_DP5.5@184.781,45.816
LED_STAT_SFP_DP6: IC8_SFP_DP6.5 R10_SFP_DP6.1 | length 10.4
  Top Layer w0.152: R10_SFP_DP6.1@198.78,43.777 v1(198.78,45.11)
  Bottom Layer w0.152: v1(198.78,45.11) 200.33,46.66 204.546,46.66 205.384,45.822 206.873,45.822 IC8_SFP_DP6.5@206.879,45.816
LED_STAT_SFP_DP7: IC8_SFP_DP7.5 R10_SFP_DP7.1 | length 10.4
  Top Layer w0.152: R10_SFP_DP7.1@221.132,43.777 v1(221.132,45.11)
  Bottom Layer w0.152: v1(221.132,45.11) 222.682,46.66 226.898,46.66 227.736,45.822 229.225,45.822 IC8_SFP_DP7.5@229.231,45.816
LOS_SFP_DP0: CN8_SFP_DP0.8 IC8_SFP_DP0.11 RP1_SFP_DP0.5 | length 18
  Top Layer w0.152: v1(65.557,48.793) 65.557,58.09 66.709,59.241 CN8_SFP_DP0.8@66.709,61.494
  Bottom Layer w0.152: RP1_SFP_DP0.5@65.316,49.86 65.316,49.035 v1(65.557,48.793) 65.557,46.756 65.847,46.466 IC8_SFP_DP0.11@67.01,46.466
LOS_SFP_DP1: CN8_SFP_DP1.8 IC8_SFP_DP1.11 RP1_SFP_DP1.5 | length 18
  Top Layer w0.152: v1(87.655,48.793) 87.655,58.09 88.807,59.241 CN8_SFP_DP1.8@88.807,61.494
  Bottom Layer w0.152: RP1_SFP_DP1.5@87.414,49.86 87.414,49.035 v1(87.655,48.793) 87.655,46.756 87.945,46.466 IC8_SFP_DP1.11@89.108,46.466
LOS_SFP_DP2: CN8_SFP_DP2.8 IC8_SFP_DP2.11 RP1_SFP_DP2.5 | length 18
  Top Layer w0.152: v1(122.453,48.793) 122.453,58.09 123.605,59.241 CN8_SFP_DP2.8@123.605,61.494
  Bottom Layer w0.152: RP1_SFP_DP2.5@122.212,49.86 122.212,49.035 v1(122.453,48.793) 122.453,46.756 122.743,46.466 IC8_SFP_DP2.11@123.906,46.466
LOS_SFP_DP3: CN8_SFP_DP3.8 IC8_SFP_DP3.11 RP1_SFP_DP3.5 | length 18
  Top Layer w0.152: v1(144.932,48.793) 144.932,58.09 146.084,59.241 CN8_SFP_DP3.8@146.084,61.494
  Bottom Layer w0.152: RP1_SFP_DP3.5@144.691,49.86 144.691,49.035 v1(144.932,48.793) 144.932,46.756 145.222,46.466 IC8_SFP_DP3.11@146.385,46.466
LOS_SFP_DP4: CN8_SFP_DP4.8 IC8_SFP_DP4.11 RP1_SFP_DP4.5 | length 18
  Top Layer w0.152: v1(167.03,48.793) 167.03,58.09 168.182,59.241 CN8_SFP_DP4.8@168.182,61.494
  Bottom Layer w0.152: RP1_SFP_DP4.5@166.789,49.86 166.789,49.035 v1(167.03,48.793) 167.03,46.756 167.32,46.466 IC8_SFP_DP4.11@168.483,46.466
LOS_SFP_DP5: CN8_SFP_DP5.8 IC8_SFP_DP5.11 RP1_SFP_DP5.5 | length 18
  Top Layer w0.152: v1(189.128,48.793) 189.128,58.09 190.28,59.241 CN8_SFP_DP5.8@190.28,61.494
  Bottom Layer w0.152: RP1_SFP_DP5.5@188.887,49.86 188.887,49.035 v1(189.128,48.793) 189.128,46.756 189.418,46.466 IC8_SFP_DP5.11@190.581,46.466
LOS_SFP_DP6: CN8_SFP_DP6.8 IC8_SFP_DP6.11 RP1_SFP_DP6.5 | length 18
  Top Layer w0.152: v1(211.226,48.793) 211.226,58.09 212.378,59.241 CN8_SFP_DP6.8@212.378,61.494
  Bottom Layer w0.152: RP1_SFP_DP6.5@210.985,49.86 210.985,49.035 v1(211.226,48.793) 211.226,46.756 211.516,46.466 IC8_SFP_DP6.11@212.679,46.466
LOS_SFP_DP7: CN8_SFP_DP7.8 IC8_SFP_DP7.11 RP1_SFP_DP7.5 | length 18
  Top Layer w0.152: v1(233.578,48.793) 233.578,58.09 234.73,59.241 CN8_SFP_DP7.8@234.73,61.494
  Bottom Layer w0.152: RP1_SFP_DP7.5@233.337,49.86 233.337,49.035 v1(233.578,48.793) 233.578,46.756 233.868,46.466 IC8_SFP_DP7.11@235.031,46.466
NetC46_2: C46.2 CN1.14 | length 13.5
  Bottom Layer w0.152: 48.307,203.505 48.307,205.584 47.798,206.093 47.798,208.379 48.23,208.811 48.23,209.456 47.798,209.888 47.798,211.055 CN1.14@48.577,211.834
  Bottom Layer w0.254: C46.2@47.549,199.555 48.307,200.313 48.307,203.505 ; CN1.14@48.577,211.792 CN1.14@48.577,211.834
NetC48_2: C48.2 CN1.15 | length 11.4
  Bottom Layer w0.152: CN1.15@48.577,210.234 48.577,209.135 49.355,208.356 49.355,206.088 48.819,205.552 48.819,203.911
  Bottom Layer w0.254: 48.819,203.911 48.819,200.012 C48.2@49.276,199.555
NetC73_SFP_DP0_2: C73_SFP_DP0.2 CN8_SFP_DP0.18 IC9_SFP_DP0.2 | length 5.5
  Top Layer w0.254: CN8_SFP_DP0.18@62.309,69.694 62.309,72.873 v1(62.309,73.33) 62.309,73.751 C73_SFP_DP0.2@62.636,74.079
  Bottom Layer w0.254: IC9_SFP_DP0.2@62.23,74.258 62.23,73.408 v1(62.309,73.33)
NetC73_SFP_DP1_2: C73_SFP_DP1.2 CN8_SFP_DP1.18 IC9_SFP_DP1.2 | length 5.5
  Top Layer w0.254: CN8_SFP_DP1.18@84.407,69.694 84.407,72.873 v1(84.407,73.33) 84.407,73.751 C73_SFP_DP1.2@84.734,74.079
  Bottom Layer w0.254: IC9_SFP_DP1.2@84.328,74.258 84.328,73.408 v1(84.407,73.33)
NetC73_SFP_DP2_2: C73_SFP_DP2.2 CN8_SFP_DP2.18 IC9_SFP_DP2.2 | length 5.5
  Top Layer w0.254: CN8_SFP_DP2.18@119.205,69.694 119.205,72.873 v1(119.205,73.33) 119.205,73.751 C73_SFP_DP2.2@119.532,74.079
  Bottom Layer w0.254: IC9_SFP_DP2.2@119.126,74.258 119.126,73.408 v1(119.205,73.33)
NetC73_SFP_DP3_2: C73_SFP_DP3.2 CN8_SFP_DP3.18 IC9_SFP_DP3.2 | length 5.5
  Top Layer w0.254: CN8_SFP_DP3.18@141.684,69.694 141.684,72.873 v1(141.684,73.33) 141.684,73.751 C73_SFP_DP3.2@142.011,74.079
  Bottom Layer w0.254: IC9_SFP_DP3.2@141.605,74.258 141.605,73.408 v1(141.684,73.33)
NetC73_SFP_DP4_2: C73_SFP_DP4.2 CN8_SFP_DP4.18 IC9_SFP_DP4.2 | length 5.5
  Top Layer w0.254: CN8_SFP_DP4.18@163.782,69.694 163.782,72.873 v1(163.782,73.33) 163.782,73.751 C73_SFP_DP4.2@164.109,74.079
  Bottom Layer w0.254: IC9_SFP_DP4.2@163.703,74.258 163.703,73.408 v1(163.782,73.33)
NetC73_SFP_DP5_2: C73_SFP_DP5.2 CN8_SFP_DP5.18 IC9_SFP_DP5.2 | length 5.5
  Top Layer w0.254: CN8_SFP_DP5.18@185.88,69.694 185.88,72.873 v1(185.88,73.33) 185.88,73.751 C73_SFP_DP5.2@186.207,74.079
  Bottom Layer w0.254: IC9_SFP_DP5.2@185.801,74.258 185.801,73.408 v1(185.88,73.33)
NetC73_SFP_DP6_2: C73_SFP_DP6.2 CN8_SFP_DP6.18 IC9_SFP_DP6.2 | length 5.5
  Top Layer w0.254: CN8_SFP_DP6.18@207.978,69.694 207.978,72.873 v1(207.978,73.33) 207.978,73.751 C73_SFP_DP6.2@208.305,74.079
  Bottom Layer w0.254: IC9_SFP_DP6.2@207.899,74.258 207.899,73.408 v1(207.978,73.33)
NetC73_SFP_DP7_2: C73_SFP_DP7.2 CN8_SFP_DP7.18 IC9_SFP_DP7.2 | length 5.5
  Top Layer w0.254: CN8_SFP_DP7.18@230.33,69.694 230.33,72.873 v1(230.33,73.33) 230.33,73.751 C73_SFP_DP7.2@230.657,74.079
  Bottom Layer w0.254: IC9_SFP_DP7.2@230.251,74.258 230.251,73.408 v1(230.33,73.33)
NetC74_SFP_DP0_2: C74_SFP_DP0.2 CN8_SFP_DP0.19 IC9_SFP_DP0.3 | length 5.8
  Top Layer w0.254: C74_SFP_DP0.2@61.062,74.079 61.509,73.632 v1@61.509,73.304 ; v1(61.316,73.33) 61.341,73.304 v1@61.509,73.304 ; CN8_SFP_DP0.19@61.509,69.694 v1@61.509,73.304
  Bottom Layer w0.254: IC9_SFP_DP0.3@60.96,74.258 60.96,73.685 v1(61.316,73.33)
NetC74_SFP_DP1_2: C74_SFP_DP1.2 CN8_SFP_DP1.19 IC9_SFP_DP1.3 | length 5.8
  Top Layer w0.254: C74_SFP_DP1.2@83.16,74.079 83.607,73.632 v1@83.607,73.304 ; v1(83.414,73.33) 83.439,73.304 v1@83.607,73.304 ; CN8_SFP_DP1.19@83.607,69.694 v1@83.607,73.304
  Bottom Layer w0.254: IC9_SFP_DP1.3@83.058,74.258 83.058,73.685 v1(83.414,73.33)
NetC74_SFP_DP2_2: C74_SFP_DP2.2 CN8_SFP_DP2.19 IC9_SFP_DP2.3 | length 5.8
  Top Layer w0.254: C74_SFP_DP2.2@117.958,74.079 118.405,73.632 v1@118.405,73.304 ; v1(118.212,73.33) 118.237,73.304 v1@118.405,73.304 ; CN8_SFP_DP2.19@118.405,69.694 v1@118.405,73.304
  Bottom Layer w0.254: IC9_SFP_DP2.3@117.856,74.258 117.856,73.685 v1(118.212,73.33)
NetC74_SFP_DP3_2: C74_SFP_DP3.2 CN8_SFP_DP3.19 IC9_SFP_DP3.3 | length 5.8
  Top Layer w0.254: C74_SFP_DP3.2@140.437,74.079 140.884,73.632 v1@140.884,73.304 ; v1(140.691,73.33) 140.716,73.304 v1@140.884,73.304 ; CN8_SFP_DP3.19@140.884,69.694 v1@140.884,73.304
  Bottom Layer w0.254: IC9_SFP_DP3.3@140.335,74.258 140.335,73.685 v1(140.691,73.33)
NetC74_SFP_DP4_2: C74_SFP_DP4.2 CN8_SFP_DP4.19 IC9_SFP_DP4.3 | length 5.8
  Top Layer w0.254: C74_SFP_DP4.2@162.535,74.079 162.982,73.632 v1@162.982,73.304 ; v1(162.789,73.33) 162.814,73.304 v1@162.982,73.304 ; CN8_SFP_DP4.19@162.982,69.694 v1@162.982,73.304
  Bottom Layer w0.254: IC9_SFP_DP4.3@162.433,74.258 162.433,73.685 v1(162.789,73.33)
NetC74_SFP_DP5_2: C74_SFP_DP5.2 CN8_SFP_DP5.19 IC9_SFP_DP5.3 | length 5.8
  Top Layer w0.254: C74_SFP_DP5.2@184.633,74.079 185.08,73.632 v1@185.08,73.304 ; v1(184.887,73.33) 184.912,73.304 v1@185.08,73.304 ; CN8_SFP_DP5.19@185.08,69.694 v1@185.08,73.304
  Bottom Layer w0.254: IC9_SFP_DP5.3@184.531,74.258 184.531,73.685 v1(184.887,73.33)
NetC74_SFP_DP6_2: C74_SFP_DP6.2 CN8_SFP_DP6.19 IC9_SFP_DP6.3 | length 5.8
  Top Layer w0.254: C74_SFP_DP6.2@206.731,74.079 207.178,73.632 v1@207.178,73.304 ; v1(206.985,73.33) 207.01,73.304 v1@207.178,73.304 ; CN8_SFP_DP6.19@207.178,69.694 v1@207.178,73.304
  Bottom Layer w0.254: IC9_SFP_DP6.3@206.629,74.258 206.629,73.685 v1(206.985,73.33)
NetC74_SFP_DP7_2: C74_SFP_DP7.2 CN8_SFP_DP7.19 IC9_SFP_DP7.3 | length 5.8
  Top Layer w0.254: C74_SFP_DP7.2@229.083,74.079 229.53,73.632 v1@229.53,73.304 ; v1(229.337,73.33) 229.362,73.304 v1@229.53,73.304 ; CN8_SFP_DP7.19@229.53,69.694 v1@229.53,73.304
  Bottom Layer w0.254: IC9_SFP_DP7.3@228.981,74.258 228.981,73.685 v1(229.337,73.33)
NetC79_SFP_DP0_2: C79_SFP_DP0.2 C120_SFP_DP0.2 CN8_SFP_DP0.16 L8_SFP_DP0.1 | length 8.4
  Top Layer w0.305: v1(63.119,68.072) v1(63.881,68.072) 63.909,68.1 CN8_SFP_DP0.16@63.909,69.694
  Bottom Layer w0.406: v1(63.119,68.072) 63.119,67.424 C79_SFP_DP0.2@63.5,67.043 63.5,67.183 63.881,67.564 v1(63.881,68.072)
  Bottom Layer w0.762: C120_SFP_DP0.2@61.825,68.656 61.9,68.581 L8_SFP_DP0.1@61.9,66.761 63.217,66.761 C79_SFP_DP0.2@63.5,67.043
NetC79_SFP_DP1_2: C79_SFP_DP1.2 C120_SFP_DP1.2 CN8_SFP_DP1.16 L8_SFP_DP1.1 | length 8.4
  Top Layer w0.305: v1(85.217,68.072) v1(85.979,68.072) 86.007,68.1 CN8_SFP_DP1.16@86.007,69.694
  Bottom Layer w0.406: v1(85.217,68.072) 85.217,67.424 C79_SFP_DP1.2@85.598,67.043 85.598,67.183 85.979,67.564 v1(85.979,68.072)
  Bottom Layer w0.762: C120_SFP_DP1.2@83.923,68.656 83.998,68.581 L8_SFP_DP1.1@83.998,66.761 85.315,66.761 C79_SFP_DP1.2@85.598,67.043
NetC79_SFP_DP2_2: C79_SFP_DP2.2 C120_SFP_DP2.2 CN8_SFP_DP2.16 L8_SFP_DP2.1 | length 8.4
  Top Layer w0.305: v1(120.015,68.072) v1(120.777,68.072) 120.805,68.1 CN8_SFP_DP2.16@120.805,69.694
  Bottom Layer w0.406: v1(120.015,68.072) 120.015,67.424 C79_SFP_DP2.2@120.396,67.043 120.396,67.183 120.777,67.564 v1(120.777,68.072)
  Bottom Layer w0.762: C120_SFP_DP2.2@118.721,68.656 118.796,68.581 L8_SFP_DP2.1@118.796,66.761 120.113,66.761 C79_SFP_DP2.2@120.396,67.043
NetC79_SFP_DP3_2: C79_SFP_DP3.2 C120_SFP_DP3.2 CN8_SFP_DP3.16 L8_SFP_DP3.1 | length 8.4
  Top Layer w0.305: v1(142.494,68.072) v1(143.256,68.072) 143.284,68.1 CN8_SFP_DP3.16@143.284,69.694
  Bottom Layer w0.406: v1(142.494,68.072) 142.494,67.424 C79_SFP_DP3.2@142.875,67.043 142.875,67.183 143.256,67.564 v1(143.256,68.072)
  Bottom Layer w0.762: C120_SFP_DP3.2@141.2,68.656 141.275,68.581 L8_SFP_DP3.1@141.275,66.761 142.592,66.761 C79_SFP_DP3.2@142.875,67.043
NetC79_SFP_DP4_2: C79_SFP_DP4.2 C120_SFP_DP4.2 CN8_SFP_DP4.16 L8_SFP_DP4.1 | length 8.4
  Top Layer w0.305: v1(164.592,68.072) v1(165.354,68.072) 165.382,68.1 CN8_SFP_DP4.16@165.382,69.694
  Bottom Layer w0.406: v1(164.592,68.072) 164.592,67.424 C79_SFP_DP4.2@164.973,67.043 164.973,67.183 165.354,67.564 v1(165.354,68.072)
  Bottom Layer w0.762: C120_SFP_DP4.2@163.298,68.656 163.373,68.581 L8_SFP_DP4.1@163.373,66.761 164.69,66.761 C79_SFP_DP4.2@164.973,67.043
NetC79_SFP_DP5_2: C79_SFP_DP5.2 C120_SFP_DP5.2 CN8_SFP_DP5.16 L8_SFP_DP5.1 | length 8.4
  Top Layer w0.305: v1(186.69,68.072) v1(187.452,68.072) 187.48,68.1 CN8_SFP_DP5.16@187.48,69.694
  Bottom Layer w0.406: v1(186.69,68.072) 186.69,67.424 C79_SFP_DP5.2@187.071,67.043 187.071,67.183 187.452,67.564 v1(187.452,68.072)
  Bottom Layer w0.762: C120_SFP_DP5.2@185.396,68.656 185.471,68.581 L8_SFP_DP5.1@185.471,66.761 186.788,66.761 C79_SFP_DP5.2@187.071,67.043
NetC79_SFP_DP6_2: C79_SFP_DP6.2 C120_SFP_DP6.2 CN8_SFP_DP6.16 L8_SFP_DP6.1 | length 8.4
  Top Layer w0.305: v1(208.788,68.072) v1(209.55,68.072) 209.578,68.1 CN8_SFP_DP6.16@209.578,69.694
  Bottom Layer w0.406: v1(208.788,68.072) 208.788,67.424 C79_SFP_DP6.2@209.169,67.043 209.169,67.183 209.55,67.564 v1(209.55,68.072)
  Bottom Layer w0.762: C120_SFP_DP6.2@207.494,68.656 207.569,68.581 L8_SFP_DP6.1@207.569,66.761 208.886,66.761 C79_SFP_DP6.2@209.169,67.043
NetC79_SFP_DP7_2: C79_SFP_DP7.2 C120_SFP_DP7.2 CN8_SFP_DP7.16 L8_SFP_DP7.1 | length 8.4
  Top Layer w0.305: v1(231.14,68.072) v1(231.902,68.072) 231.93,68.1 CN8_SFP_DP7.16@231.93,69.694
  Bottom Layer w0.406: v1(231.14,68.072) 231.14,67.424 C79_SFP_DP7.2@231.521,67.043 231.521,67.183 231.902,67.564 v1(231.902,68.072)
  Bottom Layer w0.762: C120_SFP_DP7.2@229.846,68.656 229.921,68.581 L8_SFP_DP7.1@229.921,66.761 231.238,66.761 C79_SFP_DP7.2@231.521,67.043
NetC84_1: C84.1 IC11.1 | length 3.5
  Top Layer w0.406: IC11.1@119.454,157.47 120.558,157.47 121.082,156.947 121.082,155.283 C84.1@121.056,155.257
NetC84_2: C84.2 D1.2 IC11.8 L1.1 | length 4.7
  Top Layer w0.406: 118.339,151.181 120.244,151.181 121.056,151.994 C84.2@121.056,153.657
NetC91_2: C91.2 IC11.5 R5.2 | length 4.8
  Top Layer w0.254: IC11.5@114.554,161.28 114.656,161.382 v1(114.656,162.306)
  Bottom Layer w0.152: C91.2@113.855,165.684 113.83,165.659 R5.2@113.83,164.033 114.656,163.208 v1(114.656,162.306)
NetC117_SFP_DP0_1: C117_SFP_DP0.1 C118_SFP_DP0.1 CN8_SFP_DP0.15 L9_SFP_DP0.1 | length 11.2
  Top Layer w0.305: CN8_SFP_DP0.15@64.709,69.694 64.709,68.133 v1(64.77,68.072) v1(65.532,68.072)
  Bottom Layer w0.406: v1(64.77,68.072) 64.77,67.399 C118_SFP_DP0.1@65.1,67.069 65.532,67.5 v1(65.532,68.072)
  Bottom Layer w0.762: C118_SFP_DP0.1@65.1,67.069 65.467,67.069 67.053,67.069 67.065,67.056 ; C117_SFP_DP0.1@66.572,68.174 67.065,67.68 67.065,67.056 ; L9_SFP_DP0.1@67.065,63.83 67.065,67.056
NetC117_SFP_DP1_1: C117_SFP_DP1.1 C118_SFP_DP1.1 CN8_SFP_DP1.15 L9_SFP_DP1.1 | length 11.2
  Top Layer w0.305: CN8_SFP_DP1.15@86.807,69.694 86.807,68.133 v1(86.868,68.072) v1(87.63,68.072)
  Bottom Layer w0.406: v1(86.868,68.072) 86.868,67.399 C118_SFP_DP1.1@87.198,67.069 87.63,67.5 v1(87.63,68.072)
  Bottom Layer w0.762: C118_SFP_DP1.1@87.198,67.069 87.565,67.069 89.151,67.069 89.163,67.056 ; C117_SFP_DP1.1@88.67,68.174 89.163,67.68 89.163,67.056 ; L9_SFP_DP1.1@89.163,63.83 89.163,67.056
NetC117_SFP_DP2_1: C117_SFP_DP2.1 C118_SFP_DP2.1 CN8_SFP_DP2.15 L9_SFP_DP2.1 | length 11.2
  Top Layer w0.305: CN8_SFP_DP2.15@121.605,69.694 121.605,68.133 v1(121.666,68.072) v1(122.428,68.072)
  Bottom Layer w0.406: v1(121.666,68.072) 121.666,67.399 C118_SFP_DP2.1@121.996,67.069 122.428,67.5 v1(122.428,68.072)
  Bottom Layer w0.762: C118_SFP_DP2.1@121.996,67.069 122.363,67.069 123.949,67.069 123.961,67.056 ; C117_SFP_DP2.1@123.468,68.174 123.961,67.68 123.961,67.056 ; L9_SFP_DP2.1@123.961,63.83 123.961,67.056
NetC117_SFP_DP3_1: C117_SFP_DP3.1 C118_SFP_DP3.1 CN8_SFP_DP3.15 L9_SFP_DP3.1 | length 11.2
  Top Layer w0.305: CN8_SFP_DP3.15@144.084,69.694 144.084,68.133 v1(144.145,68.072) v1(144.907,68.072)
  Bottom Layer w0.406: v1(144.145,68.072) 144.145,67.399 C118_SFP_DP3.1@144.475,67.069 144.907,67.5 v1(144.907,68.072)
  Bottom Layer w0.762: C118_SFP_DP3.1@144.475,67.069 144.842,67.069 146.428,67.069 146.44,67.056 ; C117_SFP_DP3.1@145.947,68.174 146.44,67.68 146.44,67.056 ; L9_SFP_DP3.1@146.44,63.83 146.44,67.056
NetC117_SFP_DP4_1: C117_SFP_DP4.1 C118_SFP_DP4.1 CN8_SFP_DP4.15 L9_SFP_DP4.1 | length 11.2
  Top Layer w0.305: CN8_SFP_DP4.15@166.182,69.694 166.182,68.133 v1(166.243,68.072) v1(167.005,68.072)
  Bottom Layer w0.406: v1(166.243,68.072) 166.243,67.399 C118_SFP_DP4.1@166.573,67.069 167.005,67.5 v1(167.005,68.072)
  Bottom Layer w0.762: C118_SFP_DP4.1@166.573,67.069 166.94,67.069 168.526,67.069 168.538,67.056 ; C117_SFP_DP4.1@168.045,68.174 168.538,67.68 168.538,67.056 ; L9_SFP_DP4.1@168.538,63.83 168.538,67.056
NetC117_SFP_DP5_1: C117_SFP_DP5.1 C118_SFP_DP5.1 CN8_SFP_DP5.15 L9_SFP_DP5.1 | length 11.2
  Top Layer w0.305: CN8_SFP_DP5.15@188.28,69.694 188.28,68.133 v1(188.341,68.072) v1(189.103,68.072)
  Bottom Layer w0.406: v1(188.341,68.072) 188.341,67.399 C118_SFP_DP5.1@188.671,67.069 189.103,67.5 v1(189.103,68.072)
  Bottom Layer w0.762: C118_SFP_DP5.1@188.671,67.069 189.038,67.069 190.624,67.069 190.636,67.056 ; C117_SFP_DP5.1@190.143,68.174 190.636,67.68 190.636,67.056 ; L9_SFP_DP5.1@190.636,63.83 190.636,67.056
NetC117_SFP_DP6_1: C117_SFP_DP6.1 C118_SFP_DP6.1 CN8_SFP_DP6.15 L9_SFP_DP6.1 | length 11.2
  Top Layer w0.305: CN8_SFP_DP6.15@210.378,69.694 210.378,68.133 v1(210.439,68.072) v1(211.201,68.072)
  Bottom Layer w0.406: v1(210.439,68.072) 210.439,67.399 C118_SFP_DP6.1@210.769,67.069 211.201,67.5 v1(211.201,68.072)
  Bottom Layer w0.762: C118_SFP_DP6.1@210.769,67.069 211.136,67.069 212.722,67.069 212.734,67.056 ; C117_SFP_DP6.1@212.241,68.174 212.734,67.68 212.734,67.056 ; L9_SFP_DP6.1@212.734,63.83 212.734,67.056
NetC117_SFP_DP7_1: C117_SFP_DP7.1 C118_SFP_DP7.1 CN8_SFP_DP7.15 L9_SFP_DP7.1 | length 11.2
  Top Layer w0.305: CN8_SFP_DP7.15@232.73,69.694 232.73,68.133 v1(232.791,68.072) v1(233.553,68.072)
  Bottom Layer w0.406: v1(232.791,68.072) 232.791,67.399 C118_SFP_DP7.1@233.121,67.069 233.553,67.5 v1(233.553,68.072)
  Bottom Layer w0.762: C118_SFP_DP7.1@233.121,67.069 233.488,67.069 235.074,67.069 235.086,67.056 ; C117_SFP_DP7.1@234.593,68.174 235.086,67.68 235.086,67.056 ; L9_SFP_DP7.1@235.086,63.83 235.086,67.056
NetCN8_SFP_DP0_7: CN8_SFP_DP0.7 R70_SFP_DP0.2 R71_SFP_DP0.2 | length 5.5
  Top Layer w0.152: v1@65.909,59.821 CN8_SFP_DP0.7@65.909,61.494
  Bottom Layer w0.152: v1(65.913,59.842) 67.551,58.204 R71_SFP_DP0.2@67.551,56.667
NetCN8_SFP_DP1_7: CN8_SFP_DP1.7 R70_SFP_DP1.2 R71_SFP_DP1.2 | length 5.5
  Top Layer w0.152: v1@88.007,59.821 CN8_SFP_DP1.7@88.007,61.494
  Bottom Layer w0.152: v1(88.011,59.842) 89.649,58.204 R71_SFP_DP1.2@89.649,56.667
NetCN8_SFP_DP2_7: CN8_SFP_DP2.7 R70_SFP_DP2.2 R71_SFP_DP2.2 | length 5.5
  Top Layer w0.152: v1@122.805,59.821 CN8_SFP_DP2.7@122.805,61.494
  Bottom Layer w0.152: v1(122.809,59.842) 124.447,58.204 R71_SFP_DP2.2@124.447,56.667
NetCN8_SFP_DP3_7: CN8_SFP_DP3.7 R70_SFP_DP3.2 R71_SFP_DP3.2 | length 5.5
  Top Layer w0.152: v1@145.284,59.821 CN8_SFP_DP3.7@145.284,61.494
  Bottom Layer w0.152: v1(145.288,59.842) 146.926,58.204 R71_SFP_DP3.2@146.926,56.667
NetCN8_SFP_DP4_7: CN8_SFP_DP4.7 R70_SFP_DP4.2 R71_SFP_DP4.2 | length 5.5
  Top Layer w0.152: v1@167.382,59.821 CN8_SFP_DP4.7@167.382,61.494
  Bottom Layer w0.152: v1(167.386,59.842) 169.024,58.204 R71_SFP_DP4.2@169.024,56.667